# EAGLE board ESP8266-12_Adapter (EAGLE 9.5.1)
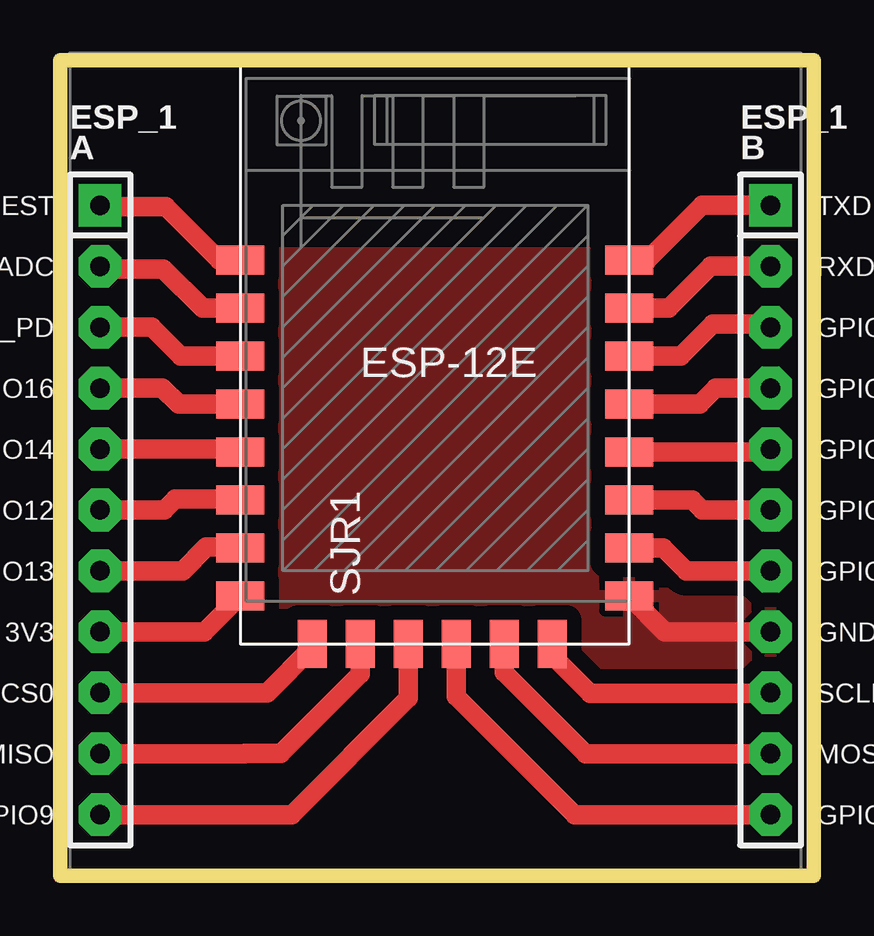
[diagram p0: board, top side]

Size 31.4 x 34 mm. Coordinates in mm from the lower left corner, seen from the top.
Outline: 0,0 31.4,0 31.4,34 0,34 0,0
Copper layers (1*16): Top 0.035mm / dielectric 1.5mm / Bottom 0.035mm
Design rules "default": minimum track width 6mil, minimum drill 0.35mm, track to track 6mil, track to pad 6mil, pad to pad 6mil, via to via 6mil, smd to smd 6mil, copper to edge 40mil, drill to drill 6mil, minimum pad ring 10mil, minimum via ring 8mil, stop-mask expansion 4mil, vias tented up to drill 0mil, thermal gap 10mil

## Footprints (pad centres in the part's own frame; a part is rotated, then mirrored left to right if it is on the bottom)
ESP8266-12-ADAPTER = drill 0.813 pad 1.778 square: 1 -13.97,8.89; 9 13.97,8.89 | drill 0.813 pad 1.778 octagon: 2 -13.97,6.35; 3 -13.97,3.81; 4 -13.97,1.27; 5 -13.97,-1.27; 6 -13.97,-3.81; 7 -13.97,-6.35; 8 -13.97,-8.89; 10 13.97,6.35; 11 13.97,3.81; 12 13.97,1.27; 13 13.97,-1.27; 14 13.97,-3.81; 15 13.97,-6.35; 16 13.97,-8.89; 17 -13.97,-11.43; 18 -13.97,-13.97; 19 -13.97,-16.51; 20 13.97,-11.43; 21 13.97,-13.97; 22 13.97,-16.51
ESP8266-ESP12E = smd 2 x 1.2: 1 -7.62,5.84; 2 -7.62,3.84; 3 -7.62,1.84; 4 -7.62,-0.16; 5 -7.62,-2.16; 6 -7.62,-4.16; 7 -7.62,-6.16; 8 -7.62,-8.16; 9 8.58,-8.16; 10 8.58,-6.16; 11 8.58,-4.16; 12 8.58,-2.16; 13 8.58,-0.16; 14 8.58,1.84; 15 8.58,3.84; 16 8.58,5.84 | smd 1.2 x 2: 17 -4.62,-10.16; 18 -2.62,-10.16; 19 -0.62,-10.16; 20 1.38,-10.16; 21 3.38,-10.16; 22 5.38,-10.16

## Placement (x,y rotation side)
ESP_1  ESP8266-12-WITH-ADAPTER  [ESP8266-12-ADAPTER]  15.64,19.05 0 top
SJR1  [ESP8266-ESP12E]  15.13,19.81 0 top

## Library data of the parts
ESP_1 = esp8266_with_adapter
SJR1 = esp12e

## Nets
ADC: ESP_1.2 SJR1.2
CH_PD: ESP_1.3 SJR1.3
CS0: ESP_1.17 SJR1.17
GND: ESP_1.16 SJR1.9
GPIO0: ESP_1.13 SJR1.12
GPIO2: ESP_1.14 SJR1.11
GPIO4: ESP_1.12 SJR1.13
GPIO5: ESP_1.11 SJR1.14
GPIO9: ESP_1.19 SJR1.19
GPIO10: ESP_1.22 SJR1.20
GPIO12: ESP_1.6 SJR1.6
GPIO13: ESP_1.7 SJR1.7
GPIO14: ESP_1.5 SJR1.5
GPIO15: ESP_1.15 SJR1.10
GPIO16: ESP_1.4 SJR1.4
MISO: ESP_1.18 SJR1.18
MOSI: ESP_1.21 SJR1.21
RESET: ESP_1.1 SJR1.1
RXD: ESP_1.10 SJR1.15
SCLK: ESP_1.20 SJR1.22
TXD: ESP_1.9 SJR1.16
VCC: ESP_1.8 SJR1.8

## Tracks (layer width: path | path; a pad name or v marks a point on that pad's centre or on a via)
ADC
  Top 0.813: ESP_1.2 1.78,25.29 4.3,25.29 5.94,23.65 SJR1.2
CH_PD
  Top 0.813: ESP_1.3 3.83,22.86 5.04,21.65 SJR1.3
CS0
  Top 0.813: ESP_1.17 8.63,7.62 10.51,9.5 SJR1.17
GND
  Top 0.813: SJR1.9 25.2,10.16 ESP_1.16
  pour Top (isolate 0.61): 0.4,34.29 0.4,0.09 30.8,-0.01 30.9,0.09 30.9,34.29
GPIO0
  Top 0.813: SJR1.12 29.48,17.65 ESP_1.13
GPIO2
  Top 0.813: ESP_1.14 26.75,15.24 26.34,15.65 SJR1.11
GPIO4
  Top 0.813: SJR1.13 26.66,19.65 27.33,20.32 ESP_1.12
GPIO5
  Top 0.813: SJR1.14 25.86,21.65 27.2,22.99 29.48,22.99 ESP_1.11
GPIO9
  Top 0.813: ESP_1.19 9.65,2.54 14.51,7.4 SJR1.19
GPIO10
  Top 0.813: SJR1.20 16.51,7.48 21.45,2.54 ESP_1.22
GPIO12
  Top 0.813: ESP_1.6 4.35,15.24 4.8,15.69 7.47,15.69 SJR1.6
GPIO13
  Top 0.813: ESP_1.7 5.11,12.7 6.1,13.69 7.47,13.69 SJR1.7
GPIO14
  Top 0.813: ESP_1.5 7.38,17.78 SJR1.5
GPIO15
  Top 0.813: SJR1.10 25.14,13.65 26.1,12.69 ESP_1.15
GPIO16
  Top 0.813: ESP_1.4 4.27,20.32 4.94,19.65 SJR1.4
MISO
  Top 0.813: ESP_1.18 7.69,5.08 7.7,5.09 9.2,5.09 12.51,8.4 SJR1.18
MOSI
  Top 0.813: SJR1.21 18.51,8.48 21.91,5.08 ESP_1.21
RESET
  Top 0.813: ESP_1.1 1.72,27.89 4.4,27.89 6.64,25.65 SJR1.1
RXD
  Top 0.813: SJR1.15 25.36,23.65 27.11,25.4 ESP_1.10
SCLK
  Top 0.813: SJR1.22 20.51,9.18 22.1,7.59 29.58,7.59 ESP_1.20
TXD
  Top 0.813: SJR1.16 24.46,25.65 26.75,27.94 ESP_1.9
VCC
  Top 0.813: ESP_1.8 6.02,10.16 SJR1.8